# Altium PCB PCB Template多层板100x100模块.PcbDoc
Units mm, origin at the board's own origin, x right, y up, seen from the top; angles counter-clockwise.
Board outline 100 x 100 mm, 2 copper layers (Top Layer, Bottom Layer); 7 components, 0 nets, 152 pads, 0 vias.
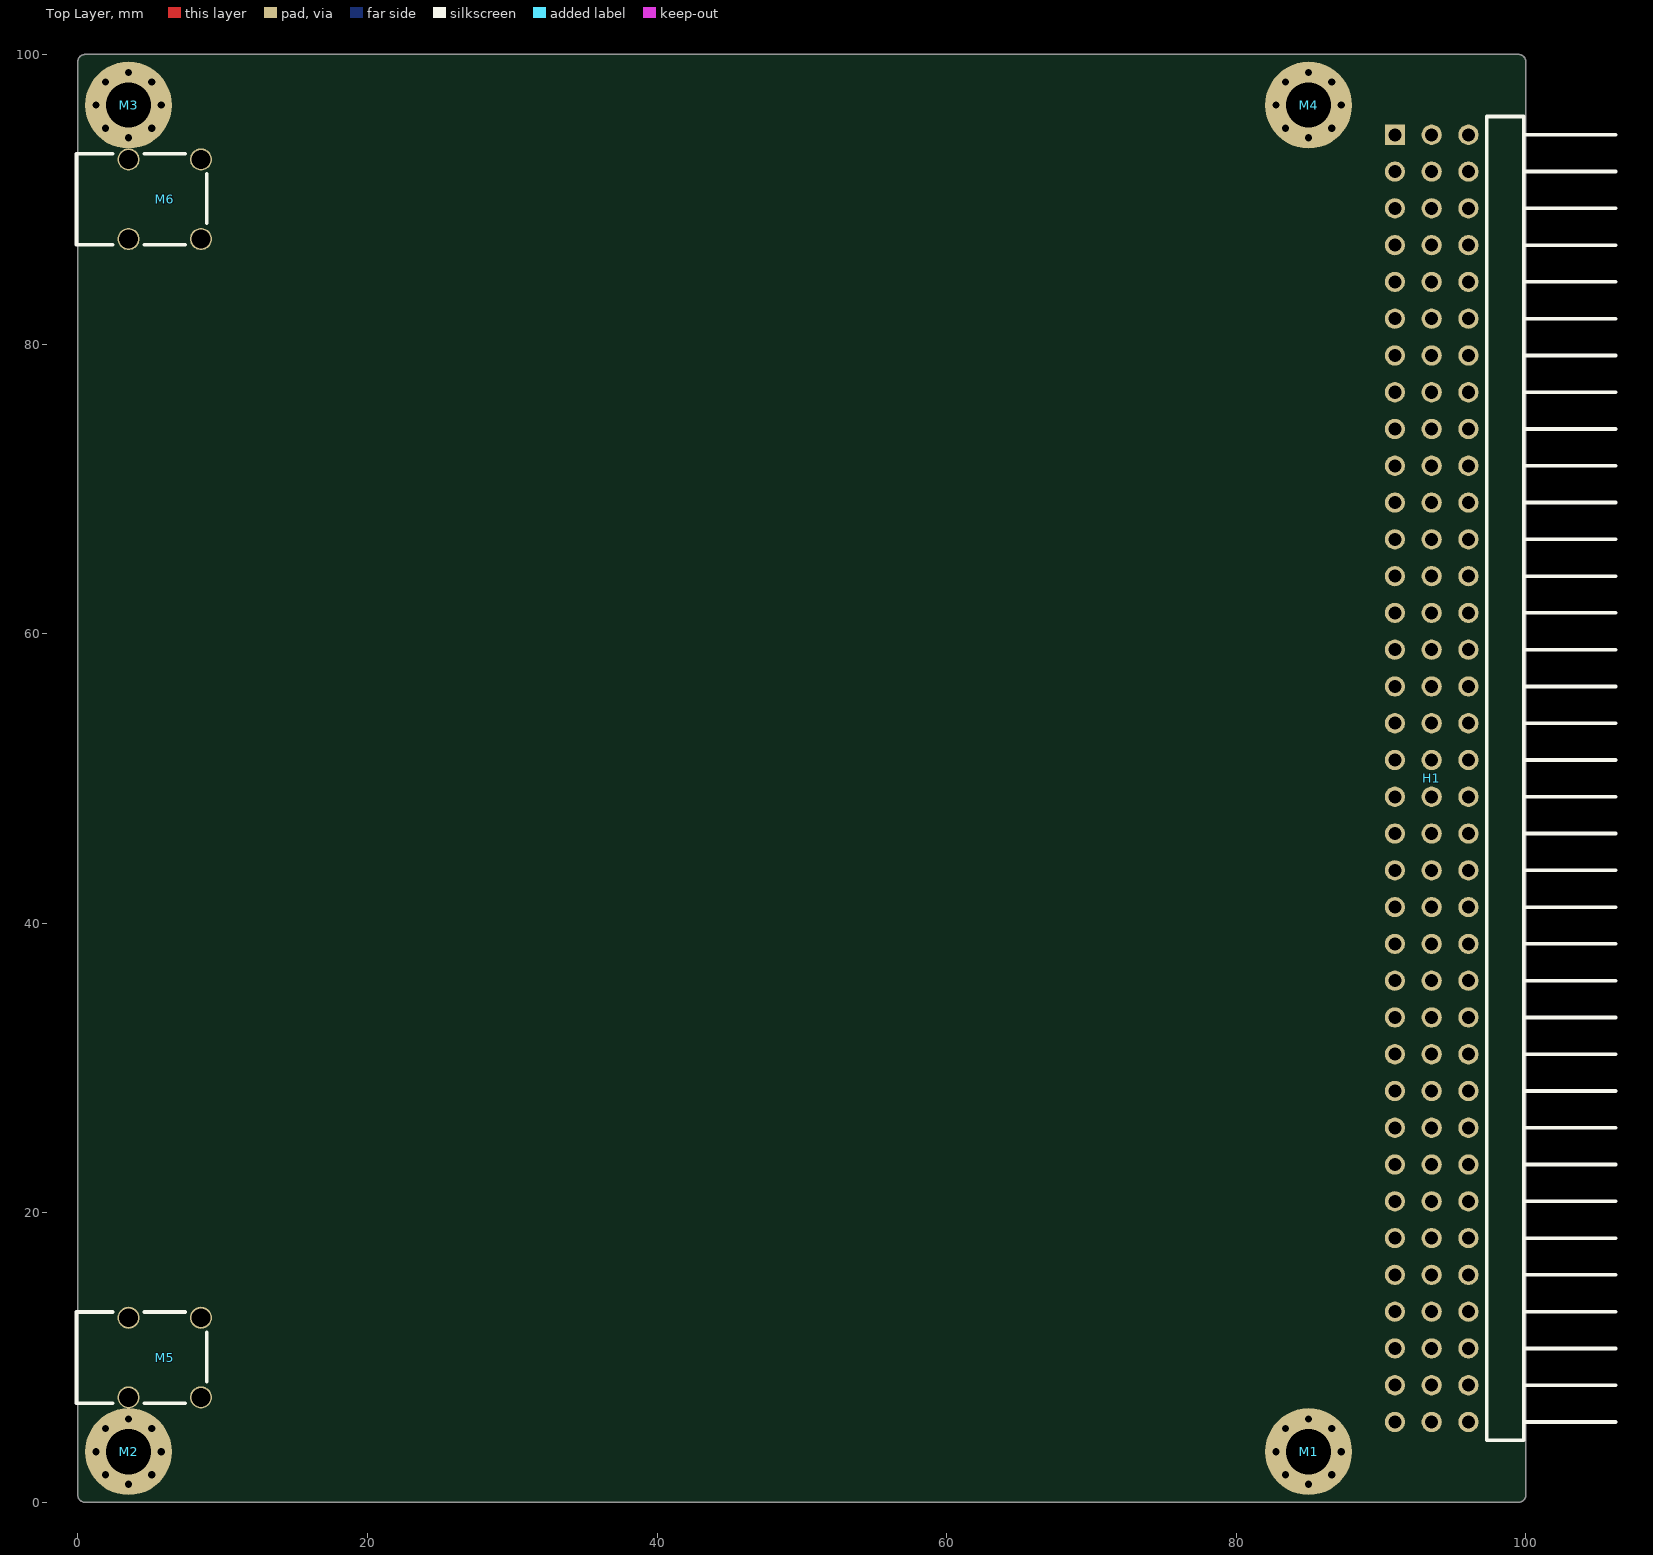
[diagram p0: Top Layer view]
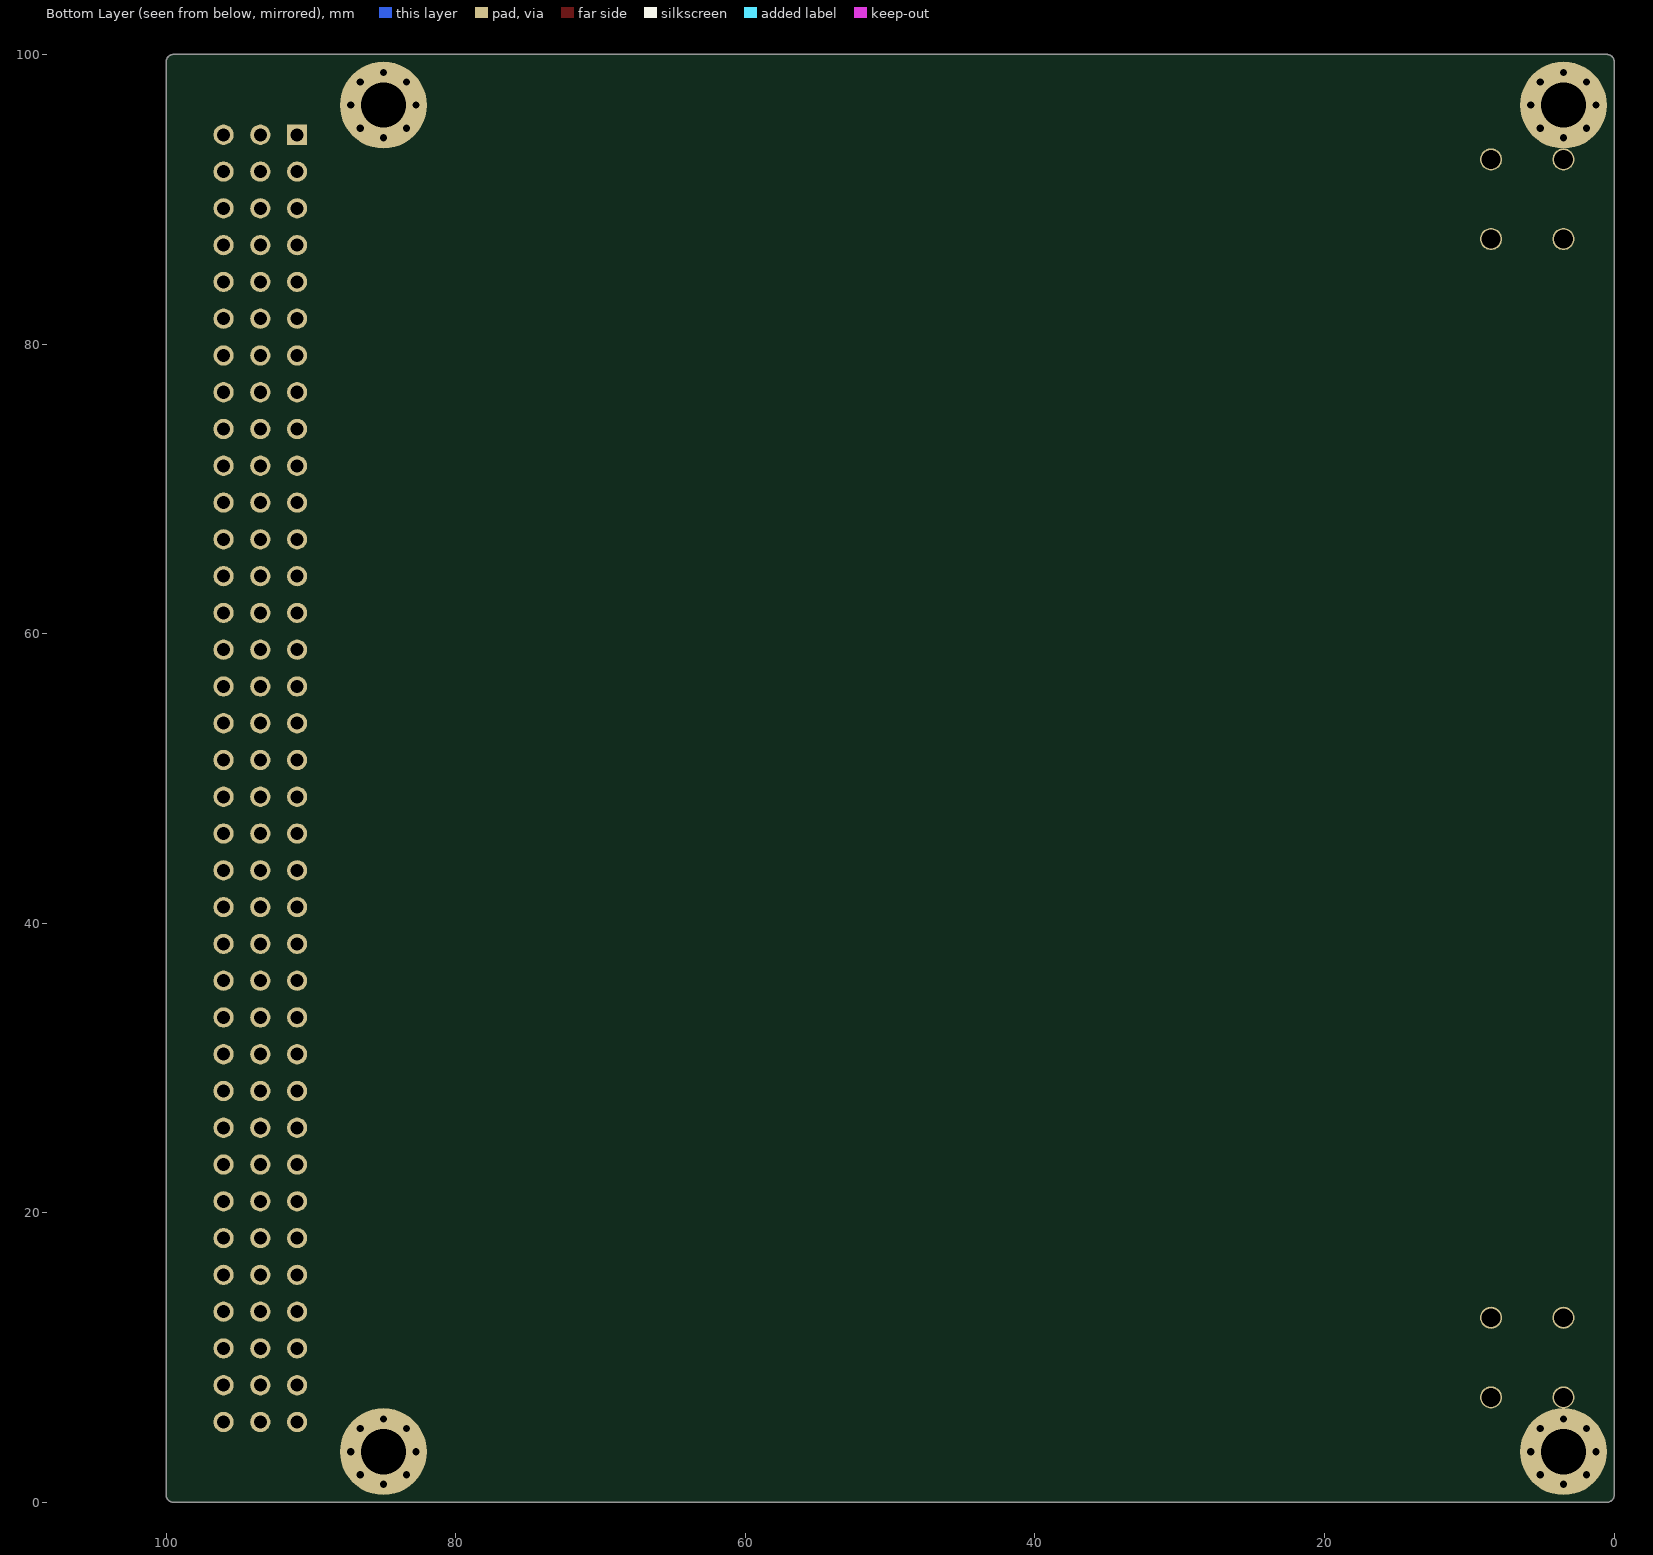
[diagram p1: Bottom Layer view, seen from below]

## Layer stack, top to bottom
Top Solder: solder mask 0.0102, Solder Resist, Dk 3.5
Top Layer: signal copper 0.0356
Dielectric1: dielectric 0.32, FR-4, Dk 4.8
Bottom Layer: signal copper 0.0356
Bottom Solder: solder mask 0.0102, Solder Resist, Dk 3.5

## Board outline
0,0.5 ccw(c0.5,0.5) 0.5,0 99.5,0 ccw(c99.5,0.5) 100,0.5 100,99.5 ccw(c99.5,99.5) 99.5,100 0.5,100 ccw(c0.5,99.5) 0,99.5

## Design rules (kind name [scope] priority, off if disabled: settings)
Clearance "keepout 20mil" [OnLayer('Keep-Out Layer')] p1: gap=0.508
Clearance "inpolygon 12mil" [inpolygon] p2: gap=0.305
Clearance "thrupin smt 100mil" [IsThruPin vs IsSMTPin] p3: gap=2.54
Clearance "mini for all 6mil" [All] p4: gap=0.089
ComponentClearance [All] p1 off: gap=0.254 collisioncheckmode=3 verticalgap=0.254 showdistances=FALSE
HoleSize [All] p1: absolutevalues=TRUE maxlimit=25.4 minlimit=0.203 maxpercent=80.000 minpercent=20.000
MinimumAnnularRing "MinimumAnnularRing_via 5mil" [isvia] p1: minimumring=0.127
MinimumAnnularRing "MinimumAnnularRing thr 8mil" [isthrupin] p2: minimumring=0.203
MinimumSolderMaskSliver [All] p1 off: minsoldermaskwidth=0.254
NetAntennae [All] p1: netantennaetolerance=0.254
PolygonConnect "PolygonConnect to thrupin" [IsThruPin] p1: connectstyle=Relief reliefconductorwidth=0.635 reliefentries=4 polygonreliefangle="90 Angle" airgapwidth=0.254
PolygonConnect "PolygonConnect to smtpin" [issmtpin] p2: connectstyle=Relief reliefconductorwidth=0.406 reliefentries=4 polygonreliefangle="90 Angle" airgapwidth=0.254
PolygonConnect "PolygonConnect to via" [isvia] p3: connectstyle=Direct reliefconductorwidth=0.254 reliefentries=4 polygonreliefangle="90 Angle" airgapwidth=0.254
RoutingVias [All] p1: holewidth=0.2 width=0.45 viastyle="Through Hole" minholewidth=0.2 minwidth=0.45 maxholewidth=0.2 maxwidth=0.45
SilkToSilkClearance [istext vs istext] p1: silktosilkclearance=0.025
SilkToSolderMaskClearance "text silkOverPads" [istext vs ispad] p1: minsilkscreentomaskgap=0.025 clearancetoexposedcopper=TRUE
SilkToSolderMaskClearance SilkscreenOverComponentPads [IsPad] p2: minsilkscreentomaskgap=0 clearancetoexposedcopper=TRUE
SolderMaskExpansion "VIA MASK" [IsVia] p1: expansion=-2.54
SolderMaskExpansion SolderMaskALL [All] p2: expansion=0.102
Width [All] p1: maxlimit=1.27 minlimit=0.089 preferedwidth=0.089 checkconnectedcopper=TRUE
24 further rules are at their usual default settings.

## Components (designator, comment, footprint, x,y, rotation, side; value= is the part's Value field where it differs from the comment)
H1 "CON_3X36P_2.54_H" HDR-TH_108P-P2.54-H-R3-C36-S2.54-W10.2 93.5,50 r0 top locked
M1 "M3-TH" M3-TH 85,3.5 r0 top locked
M2 "M3-TH" M3-TH 3.5,3.5 r0 top locked
M3 "M3-TH" M3-TH 3.5,96.5 r0 top locked
M4 "M3-TH" M3-TH 85,96.5 r0 top locked
M5 "M3-PCB-96-H-5X5.5" M3-PCB-96-H-5x5.5 6,10 r270 top locked
M6 "M3-PCB-96-H-5X5.5" M3-PCB-96-H-5x5.5 6,90 r270 top locked

## Footprints (in the part's own frame and the unit in brackets; to place one, negate y for a bottom-side part, rotate by r counter-clockwise, add the part's x,y. Pads: shape width x height; smd on the part's side, far side on the other; paste and mask are expansions set on the pad)
HDR-TH_108P-P2.54-H-R3-C36-S2.54-W10.2 [mm]
  rect 1.4x1.4 hole 0.9: 1(-2.54,44.45)
  round 1.4 hole 0.9: 2(-2.54,41.91) 3(-2.54,39.37) 4(-2.54,36.83) 5(-2.54,34.29) 6(-2.54,31.75) 7(-2.54,29.21) 8(-2.54,26.67) 9(-2.54,24.13) 10(-2.54,21.59) 11(-2.54,19.05) 12(-2.54,16.51) 13(-2.54,13.97) 14(-2.54,11.43) 15(-2.54,8.89) 16(-2.54,6.35) 17(-2.54,3.81) 18(-2.54,1.27) 19(-2.54,-1.27) 20(-2.54,-3.81) 21(-2.54,-6.35) 22(-2.54,-8.89) 23(-2.54,-11.43) 24(-2.54,-13.97) 25(-2.54,-16.51) 26(-2.54,-19.05) 27(-2.54,-21.59) 28(-2.54,-24.13) 29(-2.54,-26.67) 30(-2.54,-29.21) 31(-2.54,-31.75) 32(-2.54,-34.29) 33(-2.54,-36.83) 34(-2.54,-39.37) 35(-2.54,-41.91) 36(-2.54,-44.45) 37(0,44.45) 38(0,41.91) 39(0,39.37) 40(0,36.83) 41(0,34.29) 42(0,31.75) 43(0,29.21) 44(0,26.67) 45(0,24.13) 46(0,21.59) 47(0,19.05) 48(0,16.51) 49(0,13.97) 50(0,11.43) 51(0,8.89) 52(0,6.35) 53(0,3.81) 54(0,1.27) 55(0,-1.27) 56(0,-3.81) 57(0,-6.35) 58(0,-8.89) 59(0,-11.43) 60(0,-13.97) 61(0,-16.51) 62(0,-19.05) 63(0,-21.59) 64(0,-24.13) 65(0,-26.67) 66(0,-29.21) 67(0,-31.75) 68(0,-34.29) 69(0,-36.83) 70(0,-39.37) 71(0,-41.91) 72(0,-44.45) 73(2.54,44.45) 74(2.54,41.91) 75(2.54,39.37) 76(2.54,36.83) 77(2.54,34.29) 78(2.54,31.75) 79(2.54,29.21) 80(2.54,26.67) 81(2.54,24.13) 82(2.54,21.59) 83(2.54,19.05) 84(2.54,16.51) 85(2.54,13.97) 86(2.54,11.43) 87(2.54,8.89) 88(2.54,6.35) 89(2.54,3.81) 90(2.54,1.27) 91(2.54,-1.27) 92(2.54,-3.81) 93(2.54,-6.35) 94(2.54,-8.89) 95(2.54,-11.43) 96(2.54,-13.97) 97(2.54,-16.51) 98(2.54,-19.05) 99(2.54,-21.59) 100(2.54,-24.13) 101(2.54,-26.67) 102(2.54,-29.21) 103(2.54,-31.75) 104(2.54,-34.29) 105(2.54,-36.83) 106(2.54,-39.37) 107(2.54,-41.91) 108(2.54,-44.45)
  silkscreen extent 3.81,-45.72 12.7,45.72
M3-PCB-96-H-5x5.5 [mil]
  round 60 hole 51.18: 1(-108.27,98.43) 1(-108.27,-98.43) 1(108.27,98.43) 1(108.27,-98.43)
  silkscreen extent -124,-240 124,114
M3-TH [mm]
  round 1 hole 0.5: 1(-2.25,0) 1(-1.6,-1.6) 1(-1.6,1.6) 1(0,-2.25) 1(0,2.25) 1(1.6,-1.6) 1(1.6,1.6) 1(2.25,0)
  round 6 hole 3.125: 1(0,0)

## Part data
H1: library part H000701
M1 M2 M3 M4: library part Z000083, "M3安装孔"
M5 M6: library part Z000131, "M3螺母90度"

## Nets (pads, with @x,y where several pads share a name; then routed paths per layer and width w, separated by ;. In a path a pad name is that pad's centre, name@x,y a point inside that pad or via, vN(x,y) a via of type N, cw(c..) or ccw(c..) an arc to the next point about the centre after c; other vN are vias at no path point)
pads on no net: H1.1 H1.2 H1.3 H1.4 H1.5 H1.6 H1.7 H1.8 H1.9 H1.10 H1.11 H1.12 H1.13 H1.14 H1.15 H1.16 H1.17 H1.18 H1.19 H1.20 H1.21 H1.22 H1.23 H1.24 H1.25 H1.26 H1.27 H1.28 H1.29 H1.30 H1.31 H1.32 H1.33 H1.34 H1.35 H1.36 H1.37 H1.38 H1.39 H1.40 H1.41 H1.42 H1.43 H1.44 H1.45 H1.46 H1.47 H1.48 H1.49 H1.50 H1.51 H1.52 H1.53 H1.54 H1.55 H1.56 H1.57 H1.58 H1.59 H1.60 H1.61 H1.62 H1.63 H1.64 H1.65 H1.66 H1.67 H1.68 H1.69 H1.70 H1.71 H1.72 H1.73 H1.74 H1.75 H1.76 H1.77 H1.78 H1.79 H1.80 H1.81 H1.82 H1.83 H1.84 H1.85 H1.86 H1.87 H1.88 H1.89 H1.90 H1.91 H1.92 H1.93 H1.94 H1.95 H1.96 H1.97 H1.98 H1.99 H1.100 H1.101 H1.102 H1.103 H1.104 H1.105 H1.106 H1.107 H1.108 M1.1 M2.1 M3.1 M4.1 M5.1 M6.1

## Silkscreen, mask and mechanical layers (free items; w line width, h text height)
Mechanical 1:
  circle w0.127: c2.5,-3 r1.25
  lines w0.127: 24.25,-3.5 34.25,-3.5 ; 44.25,-3.5 46.25,-3.5 ; 48.25,-3.5 50.25,-3.5 ; 52.25,-3.5 54.25,-3.5 ; 0,0.5 ccw(c0.5,0.5) 0.5,0 99.5,0 ccw(c99.5,0.5) 100,0.5 100,99.5 ccw(c99.5,99.5) 99.5,100 0.5,100 ccw(c0.5,99.5) 0,99.5 0,0.5
  lines w2.5: 6.75,-3 10.25,-3
  text "CUT_OUT" at 12.75,-3.5 h1.27
  text "CUT" at 35.25,-3.5 h1.27
  text "V_CUT" at 55.25,-3.5 h1.27